# EAGLE board Board (EAGLE 9.7.0)
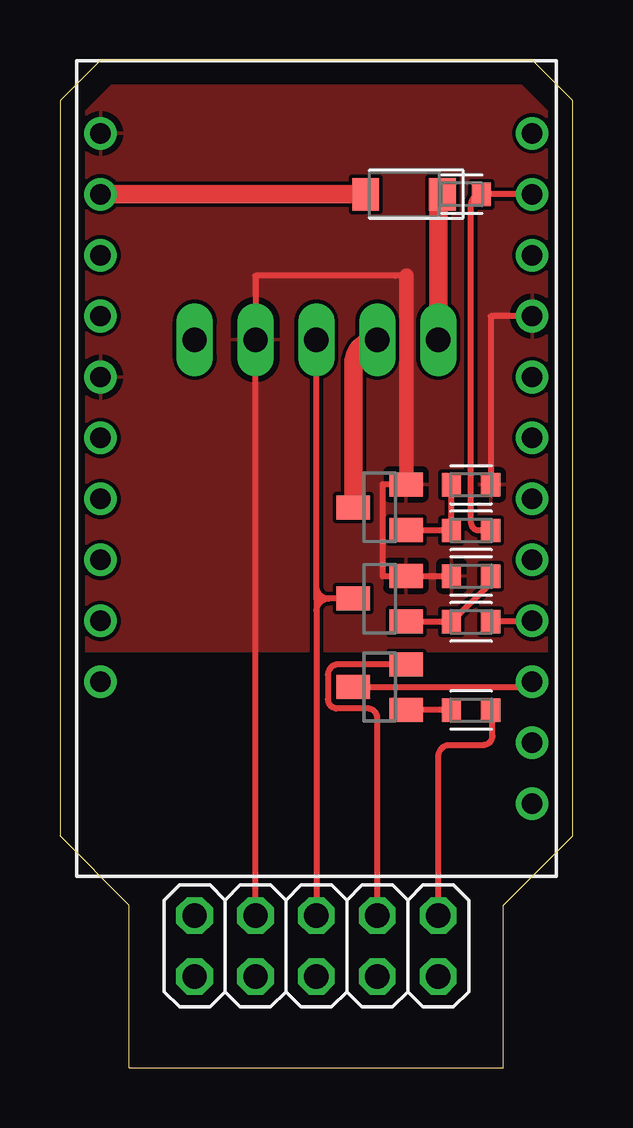
[diagram p0: board, top side]
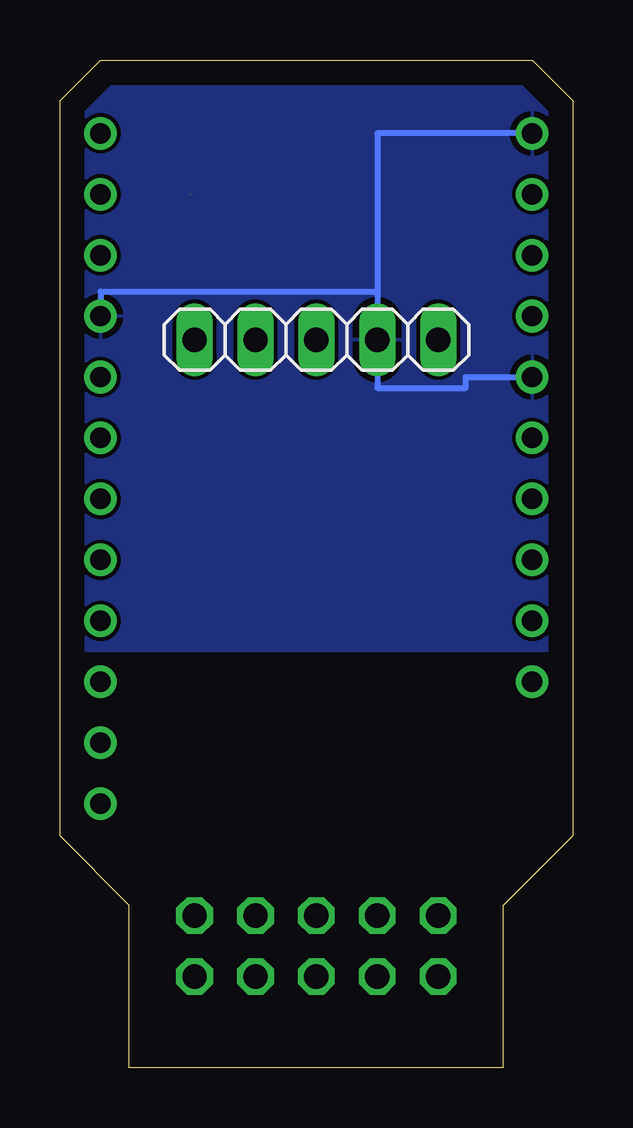
[diagram p1: board, bottom side, seen from below]

Size 21.39 x 42.02 mm. Coordinates in mm from the lower left corner, seen from the top.
Outline: 2.9,0 2.9,6.78 0,9.68 0,40.31 1.7,42.02 19.69,42.02 21.39,40.31 21.39,9.68 18.5,6.78 18.5,0 2.9,0
Copper layers (1*16): Top / Bottom
Stack-up Default Layer Stack: Top User Defined 0.035mm / Dielectric-1 User Defined 1.5mm / Bottom User Defined 0.035mm
Design rules "default": minimum track width 6mil, minimum drill 0.35mm, track to track 6mil, track to pad 6mil, pad to pad 6mil, via to via 6mil, smd to smd 6mil, copper to edge 40mil, drill to drill 6mil, minimum pad ring 10mil, minimum via ring 8mil, stop-mask expansion 4mil, vias tented up to drill 0mil, thermal gap 10mil

## Footprints (pad centres in the part's own frame; a part is rotated, then mirrored left to right if it is on the bottom)
SODFL3718X115 = smd 1.115 x 1.361: 1 -1.6,0; 2 1.6,0
2X05 = drill 1.016 octagon: 1 -5.08,-1.27; 2 -5.08,1.27; 3 -2.54,-1.27; 4 -2.54,1.27; 5 0,-1.27; 6 0,1.27; 7 2.54,-1.27; 8 2.54,1.27; 9 5.08,-1.27; 10 5.08,1.27
1X05 = drill 1.016 long: 1 -5.08,0; 2 -2.54,0; 3 0,0; 4 2.54,0; 5 5.08,0
SOT23 = smd 1 x 1.4: 1 -0.95,-1.1; 2 0.95,-1.1; 3 0,1.1
RESC1608X60 = smd 0.799 x 0.974: 1 -0.815,0; 2 0.815,0
M5STAMP_C3U_HEADER = drill 0.85: 3V3 9,6.89; 5V1 -9,-5.81; 5V2 9,-13.43; 5V3 -9,-10.89; EN 9,-0.73; G0 -9,-15.97; G1 -9,-13.43; G3 -9,11.97; G4 -9,9.43; G5 -9,6.89; G6 -9,4.35; G7 -9,1.81; G8 -9,-0.73; G9 9,-3.27; G10 -9,-3.27; G18 9,-8.35; G19 9,-10.89; G20 9,1.81; G21 9,4.35; GND1 -9,-8.35; GND2 9,-5.81; GND3 9,-15.97

## Placement (x,y rotation side)
D2  DIODE  [SODFL3718X115]  14.35,36.42 180 top
J1  PINHD-2X5  [2X05]  10.7,5.08 180 top
JP1  PINHD-1X5  [1X05]  10.7,30.35 0 bottom
Q1  NMOSFET  [SOT23]  13.34,15.88 90 top
Q2  NMOSFET  [SOT23]  13.34,23.37 90 top
Q3  NMOSFET  [SOT23]  13.34,19.56 90 top
R1  [RESC1608X60]  17.14,18.59 0 top
R2  [RESC1608X60]  17.14,22.4 0 top
R3  [RESC1608X60]  16.76,36.42 0 top
R4  [RESC1608X60]  17.14,24.31 180 top
R5  [RESC1608X60]  17.14,14.91 0 top
R7  [RESC1608X60]  17.14,20.5 0 top
U$1  M5STAMP_C3UHEADER  [M5STAMP_C3U_HEADER]  10.7,22.99 180 top

## Library data of the parts
D2 = Diode; CATEGORY: Diode; SUB-CATEGORY: Rectifier
J1 JP1 = Connector; CATEGORY: CONNECTOR; SUB-CATEGORY: PIN-HEADER
Q1-Q3 = Transistor; CATEGORY: Transistor; SUB-CATEGORY: MOSFET; TYPE: N-Channel
R1-R5 R7 = Resistor; CATEGORY: Resistor; SUB-CATEGORY: Fixed
U$1 = M5Stamp

## Nets
GND: J1.7 JP1.4 Q2.2 Q3.2 R4.1 R7.1 U$1.GND1 U$1.GND2 U$1.GND3
N$1: Q3.1 R1.1 R7.2
N$2: Q2.1 R2.1 R4.2
N$4: D2.1 JP1.1 R3.1
N$5: Q1.1 R5.1
PWR_LED+: J1.1 R5.2
PWR_LED-: J1.3 Q1.2
PWR_LED_CASE: JP1.2 Q2.3
PWR_LED_CASE_SW: R2.2 R3.2 U$1.G1
PWR_LED_MB: Q1.3 U$1.G5
PWRBTN#: J1.5 JP1.3 Q3.3
PWRBTN_MB: R1.2 U$1.G6
VCC: D2.2 U$1.5V2

## Tracks (layer width: path | path; a pad name or v marks a point on that pad's centre or on a via)
GND
  Top 0.254: J1.7 JP1.4 8.15,33.02 13.97,33.02 14.45,33.02 | R4.1 17.96,31.34 U$1.GND1 | Q2.2 13.46,24.32 13.46,20.5 14.44,20.5 | Q3.2 14.44,20.5 | 14.44,20.5 R7.1
  Top 0.61: 14.45,33.02 14.45,24.34 arc-90 Q2.2
  Bottom 0.254: U$1.GND3 8.15,38.96 JP1.4 | U$1.GND2 4.47,28.8 4.47,28.35 8.15,28.35 JP1.4 | JP1.4 8.15,32.36 19.7,32.36 U$1.GND1
  pour Bottom: -1.27,46.1 25.4,46.1 25.4,17.4 -1.27,17.4
  pour Top: -1.27,45.85 25.4,45.85 25.4,17.4 -1.27,17.4
N$1
  Top 0.254: R7.2 17.96,20.22 R1.1 14.45,18.59 Q3.1
N$2
  Top 0.254: Q2.1 16.32,22.42 R2.1 R4.2
N$4  (1 unrouted)
  Top 0.254: 15.82,30.35 JP1.1
  Top 0.762: JP1.1 15.78,36.24 arc-90 R3.1
N$5
  Top 0.254: Q1.1 16.33,14.93 R5.1
PWR_LED+
  Top 0.254: J1.1 15.78,12.98 arc-90 16.26,13.46 17.65,13.46 arc90 18.03,13.84 18.03,14.84 arc90 R5.2
PWR_LED-
  Top 0.254: Q1.2 11.62,16.82 arc90 11.18,16.38 11.18,15.37 arc90 11.56,14.99 12.83,14.99 arc-90 13.23,14.58 J1.3
PWR_LED_CASE
  Top 0.762: Q2.3 12.23,29.35 arc-90 JP1.2
PWR_LED_CASE_SW
  Top 0.254: R2.2 17.48,22.4 arc-90 17.14,22.73 17.14,35.98 arc-90 R3.2 U$1.G1
PWR_LED_MB
  Top 0.254: Q1.3 19.47,15.88 U$1.G5
PWRBTN#
  Top 0.254: 10.7,19.56 10.7,20.07 | 10.7,20.07 JP1.3 | 10.7,19.56 Q3.3 11.2,19.56 | 10.7,19.56 10.7,19.05 | 10.7,19.05 J1.5 | 11.2,19.56 arc90 10.7,19.05 | 11.2,19.56 arc-90 10.7,20.07
PWRBTN_MB
  Top 0.254: R1.2 18,18.64 U$1.G6
VCC
  Top 0.762: U$1.5V2 D2.2